# EAGLE board OOBD-Cup_v6 (EAGLE 6.4)

Size 160 x 100 mm. Coordinates in mm from the lower left corner, seen from the top.
Outline: 0,0 160,0 160,100 0,100 0,0
Copper layers (1*16): Top 0.035mm / dielectric 1.5mm / Bottom 0.035mm
Design rules "default": minimum track width 10mil, minimum drill 24mil, track to track 8mil, track to pad 8mil, pad to pad 8mil, via to via 8mil, smd to smd 8mil, copper to edge 40mil, drill to drill 8mil, minimum pad ring 10mil, minimum via ring 8mil, stop-mask expansion 4mil, vias tented up to drill 0mil, thermal gap 10mil

## Footprints (pad centres in the part's own frame; a part is rotated, then mirrored left to right if it is on the bottom)
C0603K = smd 1.05 x 1.08: 1 -0.875,0; 2 0.875,0
C6032-TE-C = smd 2.54 x 2.794: + 2.857,0; - -2.857,0
SV-D = smd 3.302 x 1.27: + -2.54,0; - 2.54,0
C0603 = smd 1.1 x 1: 1 -0.85,0; 2 0.85,0
MINIMELF = smd 1.4 x 1.8: A 1.7,0; C -1.7,0
SMB = smd 2.4 x 2.4: A 2.2,0; C -2.2,0
SOT23 = smd 1 x 1.4: 1 -0.95,-1.1; 2 0.95,-1.1; 3 0,1.1
SO08 = smd 0.66 x 2.032: 1 -1.905,-3.073; 2 -0.635,-3.073; 3 0.635,-3.073; 4 1.905,-3.073; 5 1.905,3.073; 6 0.635,3.073; 7 -0.635,3.073; 8 -1.905,3.073
SO08' = smd 0.6 x 2.2: 1 -1.905,-2.6; 2 -0.635,-2.6; 3 0.635,-2.6; 4 1.905,-2.6; 5 1.905,2.6; 6 0.635,2.6; 7 -0.635,2.6; 8 -1.905,2.6
SO8 = smd 0.66 x 2.032: 1 -1.905,-3.073; 2 -0.635,-3.073; 3 0.635,-3.073; 4 1.905,-3.073; 5 1.905,3.073; 6 0.635,3.073; 7 -0.635,3.073; 8 -1.905,3.073
BTM-182 = smd 1.676 x 0.813: P$1 -7.62,7.62; P$2 -7.62,6.35; P$3 -7.62,5.08; P$4 -7.62,3.81; P$5 -7.62,2.54; P$6 -7.62,1.27; P$7 -7.62,0; P$8 -7.62,-1.27; P$9 -7.62,-2.54; P$10 -7.62,-3.81; P$11 -7.62,-5.08; P$12 -7.62,-6.35; P$13 -7.62,-7.62; P$14 -7.62,-8.89; P$15 -7.62,-10.16; P$16 7.62,-10.16; P$17 7.62,-8.89; P$18 7.62,-7.62; P$19 7.62,-6.35; P$20 7.62,-5.08; P$21 7.62,-3.81; P$22 7.62,-2.54; P$23 7.62,-1.27; P$24 7.62,0; P$25 7.62,1.27; P$26 7.62,2.54; P$27 7.62,3.81; P$28 7.62,5.08; P$29 7.62,6.35; P$30 7.62,7.62 | smd 0.813 x 1.676: P$31 -4.445,8.255; P$32 -5.715,8.255
JP4Q = drill 0.914 octagon: 1 -3.81,-1.27; 2 -3.81,1.27; 3 -1.27,-1.27; 4 -1.27,1.27; 5 1.27,-1.27; 6 1.27,1.27; 7 3.81,-1.27; 8 3.81,1.27
JP4 = drill 0.914 long: 1 -3.81,0; 2 -1.27,0; 3 1.27,0; 4 3.81,0
JP1 = drill 0.914 long: 1 0,-1.27; 2 0,1.27
PIS2408 = smd 1.9 x 1.4: P$1 0,2.75; P$2 0,-2.75
07HCP-XXXX-50 = drill 1.1 long: 1 -2.5,0; 2 2.5,0
U57X32 = drill 0.813 long: A -1.27,0; K 1.27,0
DUOLED2X5 = drill 0.813 long: AG -2.54,0; AR 2.54,0; K 0,0
CTS406 = smd 1.9 x 1.4: 1 -2.2,-1.2; 2 2.2,-1.2; 3 2.2,1.2; 4 -2.2,1.2
R0603 = smd 1 x 1.1: 1 -0.85,0; 2 0.85,0
R0805 = smd 1.3 x 1.5: 1 -0.95,0; 2 0.95,0
FTR-B4GA = smd 0.8 x 3.1: 1 -3.8,-3.167; 2 -0.625,-3.167; 3 1.597,-3.167; 4 3.82,-3.167; 5 3.82,2.23; 6 1.597,2.23; 7 -0.625,2.23; 8 -3.8,2.23
BME0603SA = smd 2 x 2: (+)LEAD 4.295,0.425; (-)LEAD -0.475,0.425; NC -0.475,-4.345
VFQFPN36 = smd 0.6 x 0.23: 1 -2.7,2; 2 -2.7,1.5; 3 -2.7,1; 4 -2.7,0.5; 5 -2.7,0; 6 -2.7,-0.5; 7 -2.7,-1; 8 -2.7,-1.5; 9 -2.7,-2; 19 2.7,-2; 20 2.7,-1.5; 21 2.7,-1; 22 2.7,-0.5; 23 2.7,0; 24 2.7,0.5; 25 2.7,1; 26 2.7,1.5; 27 2.7,2 | smd 0.23 x 0.6: 10 -2,-2.7; 11 -1.5,-2.7; 12 -1,-2.7; 13 -0.5,-2.7; 14 0,-2.7; 15 0.5,-2.7; 16 1,-2.7; 17 1.5,-2.7; 18 2,-2.7; 28 2,2.7; 29 1.5,2.7; 30 1,2.7; 31 0.5,2.7; 32 0,2.7; 33 -0.5,2.7; 34 -1,2.7; 35 -1.5,2.7; 36 -2,2.7

## Placement (x,y rotation side)
C1  1µF  [C0603K]  -38.1,71.12 0 top  (outside the outline)
C2  220µF  [C6032-TE-C]  -25.4,50.8 0 top  (outside the outline)
C3  220pF  [C0603K]  -34.29,71.12 0 top  (outside the outline)
C4  47µ/35V  [SV-D]  -39.37,50.8 0 top  (outside the outline)
C5  100nF  [C0603K]  -27.94,71.12 0 top  (outside the outline)
C6  100n  [C0603]  -82.55,-115.57 0 top  (outside the outline)
C7  10nF  [C0603]  -66.04,-83.82 0 top  (outside the outline)
C8  100n  [C0603]  -82.55,-119.38 0 top  (outside the outline)
C9  15p  [C0603]  -82.55,-124.46 0 top  (outside the outline)
C10  15p  [C0603]  -82.55,-128.27 0 top  (outside the outline)
D1  1N4148  [MINIMELF]  -57.15,-41.91 0 top  (outside the outline)
D2  B140  [SMB]  -52.07,-5.08 0 top  (outside the outline)
D3  BAS40  [SOT23]  -45.72,41.91 0 top  (outside the outline)
IC1  PCA82C250T  [SO08]  -35.56,5.08 0 top  (outside the outline)
IC2  78L05SMD  [SO08']  -80.01,-107.95 0 top  (outside the outline)
IC3  MC34063-SO  [SO8]  -45.72,5.08 0 top  (outside the outline)
IC4  BTM-182  [BTM-182]  -64.77,-101.6 0 top  (outside the outline)
IC$2  SI9243AEY  [SO08]  -69.85,-76.2 0 top  (outside the outline)
JP1  Program  [JP4Q]  -46.99,33.02 0 top  (outside the outline)
JP1-OBD1  [JP4]  -60.96,-16.51 0 top  (outside the outline)
JP2  SPI / SD-Card  [JP4Q]  -35.56,33.02 0 top  (outside the outline)
JP2-OBD1  [JP4]  -60.96,-24.13 0 top  (outside the outline)
JP3  [JP1]  -71.12,-52.07 0 top  (outside the outline)
L1  47uH  [PIS2408]  -25.4,31.75 0 top  (outside the outline)
L2  47µH  [07HCP-XXXX-50]  -17.78,31.75 0 top  (outside the outline)
LED1  Blue  [U57X32]  -48.26,71.12 0 top  (outside the outline)
LED2  Rt/Gr  [DUOLED2X5]  -52.07,59.69 0 top  (outside the outline)
Q1  8MHz  [CTS406]  -90.17,-124.46 0 top  (outside the outline)
R1  82R  [R0603]  -60.96,58.42 0 top  (outside the outline)
R2  4k7  [R0603]  -49.53,66.04 0 top  (outside the outline)
R3  82R  [R0603]  -24.13,66.04 0 top  (outside the outline)
R4  4k7  [R0603]  -43.18,66.04 0 top  (outside the outline)
R5  10k  [R0603]  -36.83,66.04 0 top  (outside the outline)
R6  10k  [R0603]  -66.04,66.04 0 top  (outside the outline)
R7  4k7  [R0603]  -59.69,-49.53 0 top  (outside the outline)
R8  180k  [R0603]  -66.04,-49.53 0 top  (outside the outline)
R9  47k  [R0603]  -54.61,-49.53 0 top  (outside the outline)
R10  4k7  [R0603]  -17.78,66.04 0 top  (outside the outline)
R11  3k3  [R0603]  -16.51,71.12 0 top  (outside the outline)
R12  1R  [R0805]  -38.1,59.69 0 top  (outside the outline)
R13  1R  [R0805]  -27.94,59.69 0 top  (outside the outline)
R14  1R  [R0805]  -33.02,59.69 0 top  (outside the outline)
R15  5k6  [R0603]  -21.59,71.12 0 top  (outside the outline)
R16  120R  [R0603]  -66.04,-54.61 0 top  (outside the outline)
R17  10k  [R0603]  -91.44,-134.62 0 top  (outside the outline)
R18  510R  [R0603]  -72.39,-83.82 0 top  (outside the outline)
R19  10k  [R0603]  -91.44,-140.97 0 top  (outside the outline)
REL1  FTR-B4GA  [FTR-B4GA]  -62.23,-31.75 0 top  (outside the outline)
SG1  MBWOE  [BME0603SA]  -20.32,45.72 0 top  (outside the outline)
T1  BC817  [SOT23]  -53.34,41.91 0 top  (outside the outline)
T2  BC817  [SOT23]  -64.77,-43.18 0 top  (outside the outline)
T3  BC817  [SOT23]  -60.96,41.91 0 top  (outside the outline)
U1  STM32F10XTXU6  [VFQFPN36]  -29.21,43.18 0 top  (outside the outline)

## Library data of the parts
C1 C3 C5 R1-R15 = rcl
C2 = rc-master
C4 = cap-master
C6-C10 R16-R19 = resistor
D1-D3 = diode
IC1 = can
IC2 = linear
IC3 = mc34063
IC4 = BTM182
IC$2 = Vishay_ISO9141
JP1 JP1-OBD1 JP2 JP2-OBD1 JP3 = jumper
L1 L2 = Inductor-Fastron
LED1 LED2 = led
Q1 = crystal; OC_FARNELL: unknown; OC_NEWARK: unknown
REL1 = relay; MN: Fujitsu; MPN: FTR-B4GAxxxZ; OC_REICHELT: FTR-B4GA 12V
SG1 = buzzer; MF: Grewus
T1-T3 = transistor
U1 = stm32

## Nets
+3V3: C1.1 C2.+ IC4.P$14 IC4.P$16 JP1.1 L1.P$1 L2.1 R15.2 R17.2 SG1.(+)LEAD U1.1 U1.6 U1.19 U1.27
+5V: C8.1 IC1.3 IC2.1 IC$2.3
+12V: C4.+ C5.1 C6.1 D1.C D2.C IC2.8 IC3.6 LED1.A R12.2 R13.2 R14.2 REL1.1
A0: JP2.3 R10.1
BOOT0: JP1.2 R19.2 U1.35
BT_RES-: IC4.P$21
BTM_RX: IC4.P$10 JP1.8
BTM_TX: IC4.P$9 JP1.6
CAN-RXD: IC1.4
CAN-TXD: IC1.1
CAN_SW: R7.1
CS: JP2.2
CTS: JP2.5
GND: C1.2 C2.- C3.2 C4.- C5.2 C6.2 C7.2 C8.2 C9.1 C10.1 D3.1 IC1.2 IC1.8 IC2.2 IC2.3 IC2.6 IC2.7 IC3.4 IC4.P$15 IC$2.5 JP1.3 JP2-OBD1.3 LED2.K R5.2 R6.2 R9.1 R11.2 R19.1 T1.2 T2.2 T3.2 U1.5 U1.18 U1.26 U1.36
HS_CAN-H: JP1-OBD1.1 REL1.2
HS_CAN-L: JP1-OBD1.2 REL1.7
K-LINE: C7.1 IC$2.6 JP2-OBD1.2 R18.1
L-LINE: IC$2.8 JP2-OBD1.1
MISO: JP2.6
MODE1: R5.1 R6.1
MOSI: JP2.8
MS_CAN-H: JP1-OBD1.3 REL1.4
MS_CAN-L: JP1-OBD1.4 REL1.5
N$1: C10.2 Q1.1 U1.2
N$2: C9.2 Q1.3 U1.3
N$3: IC1.6 JP3.1 REL1.6
N$4: LED2.AR R3.2
N$5: IC1.7 R16.2 REL1.3
N$6: LED2.AG R1.2
N$7: LED1.K R4.1
N$8: R2.1
N$9: R2.2 T1.1
N$10: R4.2 T1.3
N$11: C3.1 IC3.3
N$12: IC3.1 IC3.7 IC3.8 R12.1 R13.1 R14.1
N$13: IC3.5 R11.1 R15.1
N$14: D3.3 IC3.2 L1.P$2 L2.2
N$16: JP3.2 R16.1
N$20: R7.2 T2.1
N$23: SG1.(-)LEAD T3.3
N$24: R10.2 T3.1
N$27: D1.A R8.2 REL1.8 T2.3
REL_DIAG: R8.1 R9.2
RESET-: JP1.4 R17.1 U1.4
RTS: JP2.7
RX_K: IC$2.1 U1.10
RX_L: IC$2.2
SCK: JP2.4
STM_RXD: JP1.5 U1.22
STM_TXD: JP1.7 U1.21
TX: IC$2.4 U1.9
VBAT: D2.A IC$2.7 JP2-OBD1.4 R18.2

## Tracks (layer width: path | path; a pad name or v marks a point on that pad's centre or on a via)
+3V3  (13 unrouted)
+5V  (3 unrouted)
+12V  (11 unrouted)
A0  (1 unrouted)
BOOT0  (2 unrouted)
BTM_RX  (1 unrouted)
BTM_TX  (1 unrouted)
GND  (34 unrouted)
HS_CAN-H  (1 unrouted)
HS_CAN-L  (1 unrouted)
K-LINE  (3 unrouted)
L-LINE  (1 unrouted)
MODE1  (1 unrouted)
MS_CAN-H  (1 unrouted)
MS_CAN-L  (1 unrouted)
N$1  (2 unrouted)
N$2  (2 unrouted)
N$3  (2 unrouted)
N$4  (1 unrouted)
N$5  (2 unrouted)
N$6  (1 unrouted)
N$7  (1 unrouted)
N$9  (1 unrouted)
N$10  (1 unrouted)
N$11  (1 unrouted)
N$12  (5 unrouted)
N$13  (2 unrouted)
N$14  (3 unrouted)
N$16  (1 unrouted)
N$20  (1 unrouted)
N$23  (1 unrouted)
N$24  (1 unrouted)
N$27  (3 unrouted)
REL_DIAG  (1 unrouted)
RESET-  (2 unrouted)
RX_K  (1 unrouted)
STM_RXD  (1 unrouted)
STM_TXD  (1 unrouted)
TX  (1 unrouted)
VBAT  (3 unrouted)